# Altium PCB launch_stand_interface.PcbDoc
Units mil, origin at the board's own origin, x right, y up, seen from the top; angles counter-clockwise.
Board outline 2400 x 1500 mil, 2 copper layers (Top Layer, Bottom Layer); 22 components, 14 nets, 62 pads, 13 vias.
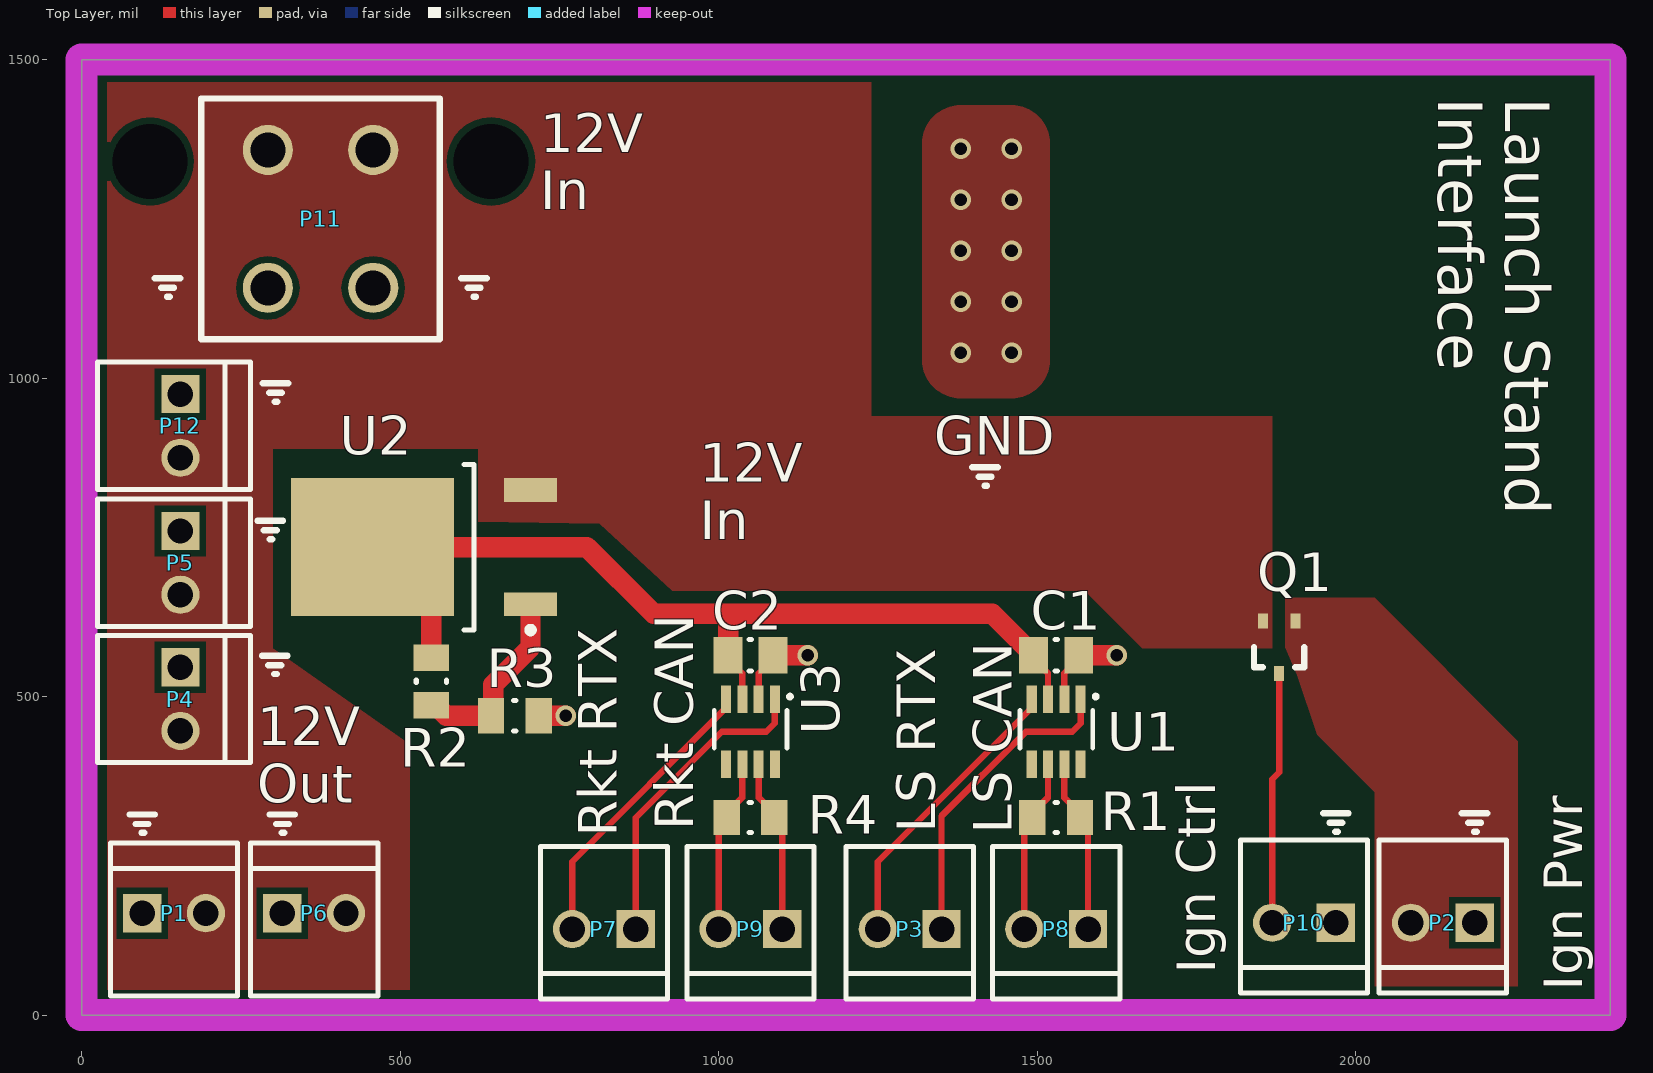
[diagram p0: Top Layer view]
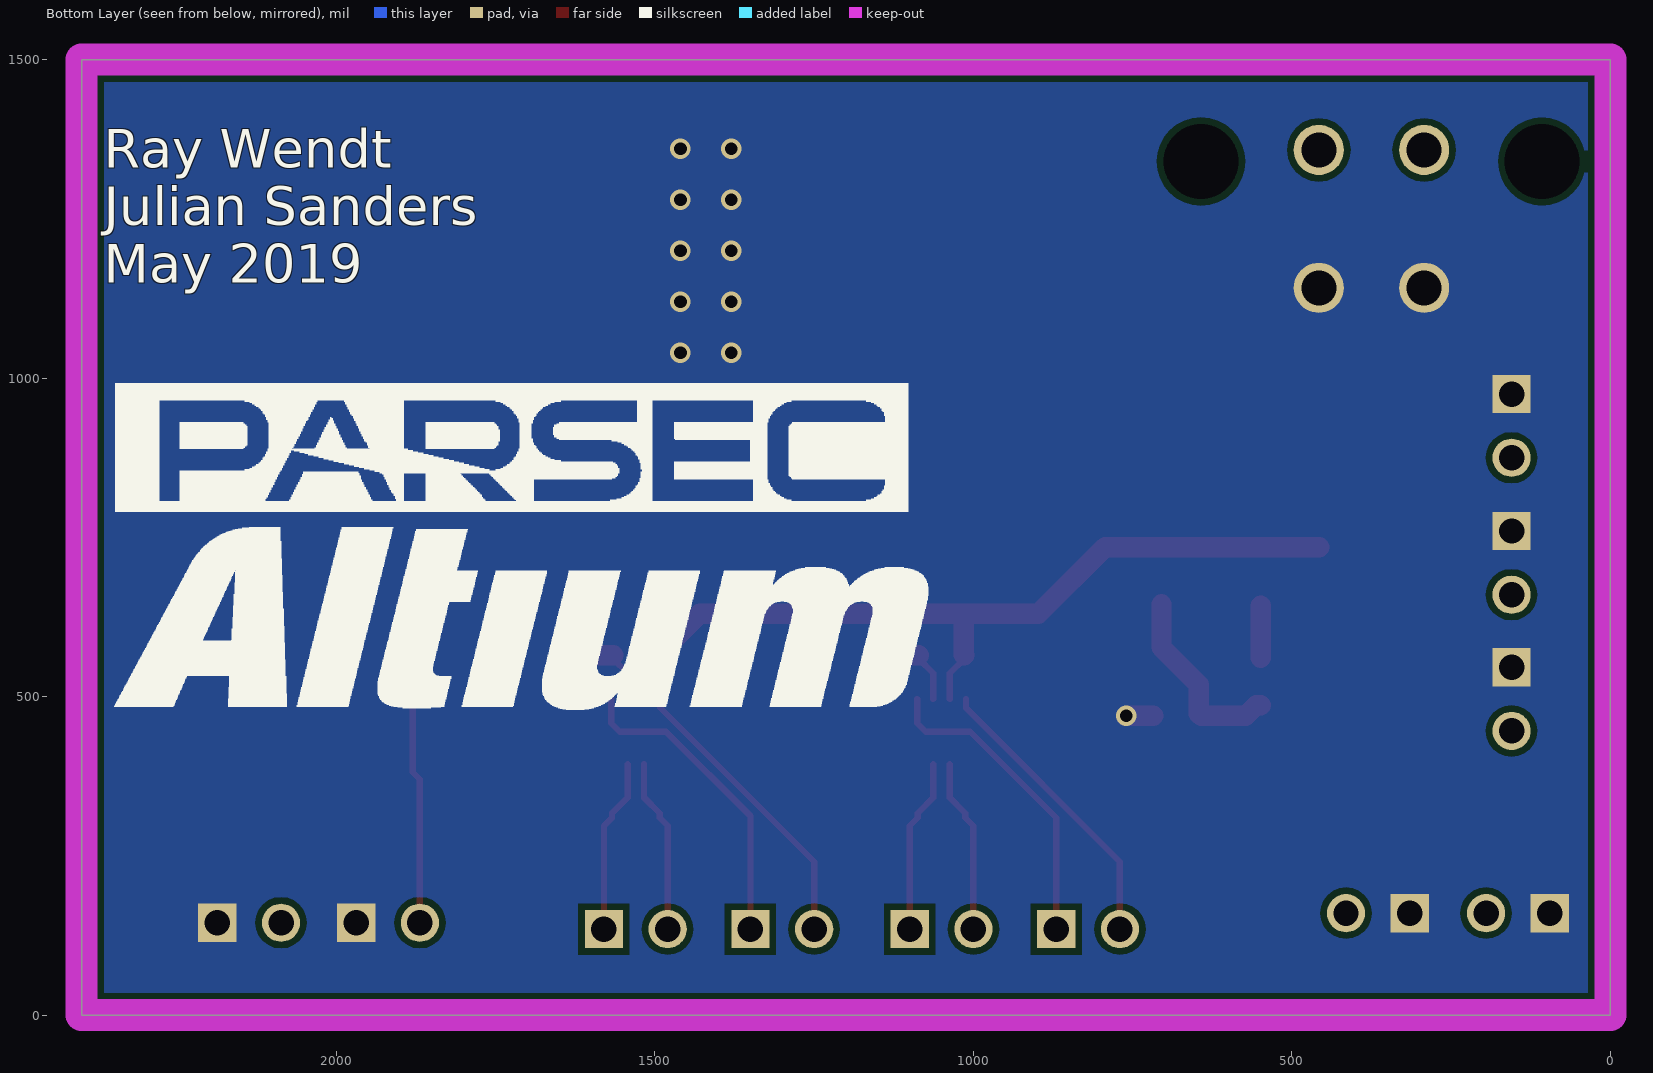
[diagram p1: Bottom Layer view, seen from below]
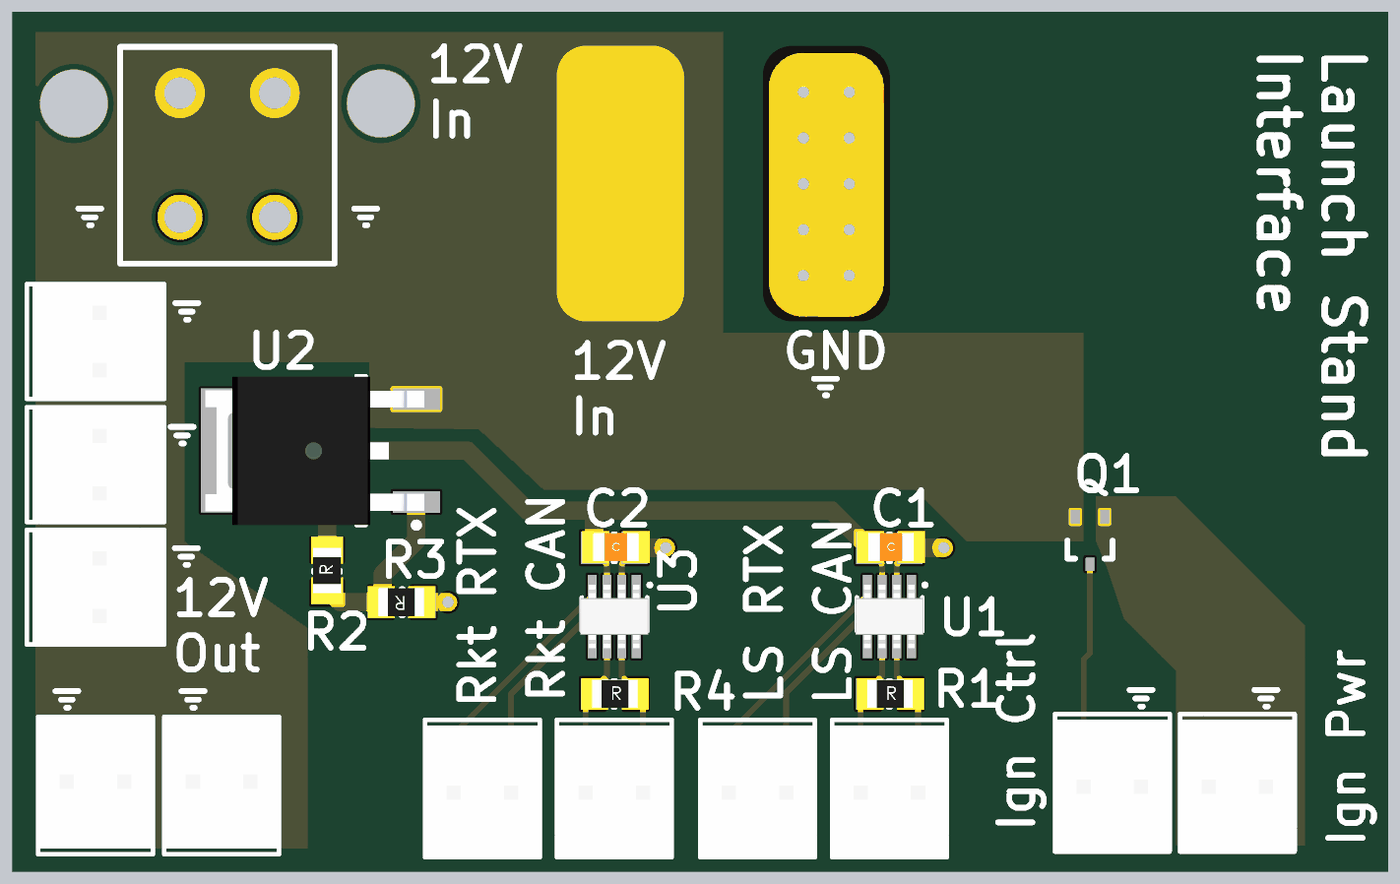
[diagram p2: 3D render of the assembled board from above, using the file's embedded part models]

## Layer stack, top to bottom
Top Solder: solder mask 0.4, Solder Resist, Dk 3.5
Top Layer: signal copper 1.4
Dielectric 1: dielectric 12.6, FR-4, Dk 4.8
Bottom Layer: signal copper 1.4
Bottom Solder: solder mask 0.4, Solder Resist, Dk 3.5

## Board outline
0,0 2400,0 2400,1500 0,1500

## Design rules (kind name [scope] priority, off if disabled: settings)
Clearance [All] p1: gap=10 ignorepadtopadclearanceinfootprint=FALSE except(0: Arc-Hole Track-Hole SMDPad-Hole THPad-Hole Via-Hole Fill-Hole Poly-Hole Region-Hole Text-Hole)
PlaneConnect PlaneConnect_2 [All] p1 off: planeconnectstyle=Relief reliefexpansion=20 reliefentries=4 reliefconductorwidth=10 reliefairgap=10
PlaneConnect PlaneConnect_1 [IsVia] p2 off: planeconnectstyle=Direct reliefexpansion=20 reliefentries=4 reliefconductorwidth=10 reliefairgap=10
PlaneConnect DirectConnect [All] p3: planeconnectstyle=Direct reliefexpansion=20 reliefentries=4 reliefconductorwidth=10 reliefairgap=10
PolygonConnect PolygonConnect_4 [All vs IsNamedPolygon('Ignition Out')] p1: connectstyle=Direct reliefconductorwidth=10 reliefentries=4 polygonreliefangle="90 Angle" airgapwidth=10
PolygonConnect PolygonConnect_3 [All vs IsNamedPolygon('Ignition Out')] p2: thpad.connectstyle=Direct thpad.reliefconductorwidth=10 thpad.reliefentries=4 thpad.polygonreliefangle="90 Angle" thpad.airgapwidth=10 smdpad.connectstyle=Relief smdpad.reliefconductorwidth=10 smdpad.reliefentries=4 smdpad.polygonreliefangle="90 Angle" smdpad.airgapwidth=10 via.connectstyle=Relief via.reliefconductorwidth=10 via.reliefentries=4 via.polygonreliefangle="90 Angle" via.airgapwidth=10
PolygonConnect PolygonConnect_2 [All vs IsNamedPolygon('GND Pad Metal') Or  IsNamedPolygon('12V Power') Or  IsNamedPolygon('GND Mask Open') Or  IsNamedPolygon('12V Pad Metal') Or  IsNamedPolygon('Bottom Layer-GND') Or  IsNamedPolygon('12V Mask Open')] p3: connectstyle=Direct reliefconductorwidth=10 reliefentries=4 polygonreliefangle="90 Angle" airgapwidth=10
PolygonConnect PolygonConnect_1 [IsVia] p4: connectstyle=Direct reliefconductorwidth=10 reliefentries=4 polygonreliefangle="90 Angle" airgapwidth=10
PolygonConnect [All] p5: connectstyle=Relief reliefconductorwidth=10 reliefentries=4 polygonreliefangle="90 Angle" airgapwidth=10
RoutingVias [All] p1: holewidth=15 width=25 viastyle="Through Hole" minholewidth=10 minwidth=15 maxholewidth=20 maxwidth=32
SolderMaskExpansion [All] p1: expansion=4
Width [All] p1: maxlimit=32 minlimit=10 preferedwidth=10
29 further rules are at their usual default settings.

## Components (designator, comment, footprint, x,y, rotation, side; value= is the part's Value field where it differs from the comment)
C1 "100n" C0805 1530,565 r0 top
C2 "100n" C0805 1050,565 r0 top
P1 "Molex KK 1x2" "Molex KK 2x1" 145,160 r90 top
P2 "Molex KK 1x2" "Molex KK 2x1" 2137,145 r270 top
P3 "Molex KK 1x2" "Molex KK 2x1" 1300,135 r270 top
P4 "Molex KK 1x2" "Molex KK 2x1" 155,496.18 r0 top
P5 "Molex KK 1x2" "Molex KK 2x1" 155,710 r0 top
P6 "Molex KK 1x2" "Molex KK 2x1" 365,160 r90 top
P7 "Molex KK 1x2" "Molex KK 2x1" 820,135 r270 top
P8 "Molex KK 1x2" "Molex KK 2x1" 1530,135 r270 top
P9 "Molex KK 1x2" "Molex KK 2x1" 1050,135 r270 top
P10 "Molex KK 1x2" "Molex KK 2x1" 1919,145 r270 top
P11 "4-pin-power-atx" 4-pin-atx 375,1250 r180 top
P12 "Molex KK 1x2" "Molex KK 2x1" 155,925 r0 top
Q1 "MCH3484" SC-70FL/MCPH3 1880,577.54 r180 top
R1 "120R" R0805 1530,310 r0 top
R2 "240R" R0805 548.92,523.82 r90 top
R3 "390 R" R0805 680,470 r180 top
R4 "120R" R0805 1050,310 r0 top
U1 "TCAN332DCNT" SOT-23-8 1530,445 r180 top
U2 "LM317" D-PAK 537.4,734.65 r180 top
U3 "TCAN332DCNT" SOT-23-8 1050,445 r180 top

## Footprints (in the part's own frame and the unit in brackets; to place one, negate y for a bottom-side part, rotate by r counter-clockwise, add the part's x,y. Pads: shape width x height; smd on the part's side, far side on the other; paste and mask are expansions set on the pad)
4-pin-atx [mm]
  round 2 hole 1.4: 1(-2.1,2.75) 2(2.1,2.75) 3(-2.1,-2.75) 4(2.1,-2.75)
  round 2 hole 3: ""(-6.8,-2.29) ""(6.8,-2.29)
  silkscreen extent -4.75,-4.8 4.75,4.8
C0805 [mm] "Chip Capacitor, Body 2.0x1.2mm, Height 0.75mm, IPC Medium Density"
  rect 1.15x1.45 smd: 1(-0.9,0) 2(0.9,0)
  silkscreen extent -0.05,-0.62 0.05,0.63, body extent -1.42,-0.67 1.58,0.73, height 0.93
D-PAK [mm] "D-PAK, 4-Leads, Body 6.1x6.5mm, Pitch 2.28mm, Lead Span 9.7mm, IPC Medium Density"
  rect 2.1x0.95 smd: 1(-4.25,2.28) 3(-4.25,-2.28)
  rect 6.5x5.5 smd: 4(2.05,0)
  silkscreen extent -4.38,-3.3 -1.6,3.43, body extent -4.6,-3.28 5.1,3.3, height 2.3
"Molex KK 2x1" [mil]
  rect 60x60 hole 40: 1(0,50)
  round 60 hole 40: 2(0,-50)
  silkscreen extent -130,-100 110,100, body extent -120,-100 110,100, height 458
R0805 [mm] "Chip Resistor, Body 2.0x1.3mm, IPC Medium Density"
  rect 1.05x1.4 smd: 1(-0.95,0) 2(0.95,0)
  silkscreen extent -0.05,-0.6 0.05,0.6, body extent -1.46,-0.7 1.54,0.7, height 0.53
SC-70FL/MCPH3 [mm]
  rect 0.4x0.6 smd: 1(-0.65,-1.05) 2(0.65,-1.05) 3(0,1.05)
  silkscreen extent -1,0 1,0.8
SOT-23-8 [mm] "SOT-23-8"
  rect 0.4x1.1 smd: 1(-0.975,-1.3) 2(-0.325,-1.3) 3(0.325,-1.3) 4(0.975,-1.3) 5(0.975,1.3) 6(0.325,1.3) 7(-0.325,1.3) 8(-0.975,1.3)
  silkscreen extent -1.65,-1.48 1.44,0.65, body extent -1.5,-1.4 1.5,1.4, height 1.11

## Part data
C1 C2: library part C0805, "0805 Capacitor"
P1 P2 P3 P4 P5 P6 P7 P8 P9 P10 P12: "1x2 Molex KK Connector"
R1 R2 R3 R4: library part R0805, "RESISTOR 0805"
U1 U3: "IC TXRX CAN 3.3V SOT23-8"
U2: "Linear Voltage Regulator"

## Via types
v1: diameter 32, hole 20, Top Layer to Bottom Layer, 13 vias

## Nets (pads, with @x,y where several pads share a name; then routed paths per layer and width w, separated by ;. In a path a pad name is that pad's centre, name@x,y a point inside that pad or via, vN(x,y) a via of type N, cw(c..) or ccw(c..) an arc to the next point about the centre after c; other vN are vias at no path point)
3.3V: C1.1 C2.1 R2.2 U1.3 U2.4 U3.3 | length 1414.4
  Top Layer w10: C2.1 1014.57,559.09 1037.2,536.46 U3.3 ; C1.1 1494.57,559.09 1517.2,536.46 U1.3
  Top Layer w32: U2.4 793.39,734.65 898.03,630 1015,630 ; R2.2 U2.4@548.92,642.42 ; C2.1 1015,565.43 1015,630 ; C1.1 1494.57,570.91 1487.93,577.54 1482.02,577.54 1429.57,630 1015,630
12V: P1.2 P4.2 P5.2 P6.2 P11.3 P11.4 P12.2 Q1.2 U2.3
CANH1: P9.1 R4.2 U3.7 | length 274.2
  Top Layer w10: U3.7 1062.8,341.5 1087.4,316.89 R4.2 1100,297.4 P9.1
CANH2: P8.1 R1.2 U1.7 | length 274.2
  Top Layer w10: U1.7 1542.8,341.5 1567.4,316.89 R1.2 1580,297.4 P8.1
CANL1: P9.2 R4.1 U3.6 | length 274.2
  Top Layer w10: P9.2 1000,297.4 R4.1 1012.6,316.89 1037.2,341.5 U3.6
CANL2: P8.2 R1.1 U1.6 | length 274.2
  Top Layer w10: P8.2 1480,297.4 R1.1 1492.6,316.89 1517.2,341.5 U1.6
GND: C1.2 C2.2 P1.1 P2.1 P4.1 P5.1 P6.1 P10.1 P11.1 P11.2 P12.1 R3.1 U1.2 U3.2 | length 313.1
  Top Layer w10: U3.2 1062.8,536.46 1085.43,559.09 C2.2 ; U1.2 1542.8,536.46 1565.43,559.09 C1.2
  Top Layer w32: R3.1 v1(760,470) ; C2.2 v1(1140,565) ; C1.2 v1(1625,565)
  other v1: 1380,1040 1460,1040 1380,1120 1460,1120 1380,1200 1460,1200 1380,1280 1460,1280 1380,1360 1460,1360
NetP2_2: P2.2 Q1.1
NetP3_1: P3.1 U1.1 | length 494.1
  Top Layer w10: P3.1 1350,312.5 1482.5,445 1555,445 1568.39,458.39 U1.1
NetP3_2: P3.2 U1.4 | length 461.3
  Top Layer w10: P3.2 1250,240.79 1491.61,482.4 U1.4
NetP7_1: P7.1 U3.1 | length 492.6
  Top Layer w10: P7.1 870,310 1005,445 1075,445 1088.39,458.39 U3.1
NetP7_2: P7.2 U3.4 | length 461.3
  Top Layer w10: P7.2 770,240.79 1011.61,482.4 U3.4
NetP10_2: P10.2 Q1.3 | length 395.8
  Top Layer w10: P10.2 1869,370 1880,381 Q1.3
NetR2_1: R2.1 R3.2 U2.1 | length 301.1
  Top Layer w32: R2.1 555.81,486.42 572.22,470 R3.2 645.95,473.35 645.95,518.76 704.72,577.54 U2.1
pads on no net: P11. U1.5 U1.8 U3.5 U3.8

## Polygon pours and split planes (outlines as drawn)
12V on Top Layer "12V Power" (solid, pour order 9): 40,40 40,1470 1240,1470 1240,940 1869,940 1869,576 1664.88,576 1574.88,666 927,666 813.54,771.78 622.84,774.16 622.84,889 300,889 300,576 515,425 515,40 300,40
NetP2_2 on Top Layer "Ignition Out" (solid, pour order 11): 1890,655 1890,577.54 1908.4,533.4 1940,440 2030,350 2030,45 2255,45 2255,430 2030,655
GND on Top Layer "GND Pad Metal" (solid, pour order 5): 1380,1428.42 ccw(c1380,1368.42) 1320,1368.42 1320,1028.42 ccw(c1380,1028.42) 1380,968.42 1460,968.42 ccw(c1460,1028.42) 1520,1028.42 1520,1368.42 ccw(c1460,1368.42) 1460,1428.42
12V on Top Layer "12V Pad Metal" (solid, pour order 3): 1020,1460 ccw(c1020,1400) 960,1400 960,1060 ccw(c1020,1060) 1020,1000 1100,1000 ccw(c1100,1060) 1160,1060 1160,1400 ccw(c1100,1400) 1100,1460
no net on Top Solder "GND Mask Open" (solid): 1360.88,1440.88 ccw(c1360.87,1389.13) 1309.12,1389.12 1309.12,1011.75 ccw(c1360.87,1011.75) 1360.88,960 1479.12,960 ccw(c1479.12,1011.75) 1530.88,1011.75 1530.88,1379.72 ccw(c1473.71,1383.71) 1477.59,1440.88
no net on Top Solder "12V Mask Open" (solid, pour order 7): 1001.75,1440.88 ccw(c1001.75,1389.13) 950,1389.12 950,1011.75 ccw(c1001.75,1011.75) 1001.75,960 1120,960 ccw(c1120,1011.75) 1171.75,1011.75 1171.75,1379.72 ccw(c1114.59,1383.71) 1118.47,1440.88
GND on Bottom Layer "Bottom Layer-GND" (solid, pour order 0): 25,25 2375,25 2375,1475 25,1475 25,860 25,765

## Keep-outs
Keep-Out Layer:
  the board outline again, w50

## Silkscreen, mask and mechanical layers (free items; w line width, h text height)
Top Overlay:
  lines w10: 75,315 115,315 ; 85,300 105,300 ; 94,286 98,286 ; 115,1156.73 155,1156.73 ; 125,1141.73 145,1141.73 ; 134,1127.73 138,1127.73 ; 276,776 316,776 ; 283.22,564.41 323.22,564.41 ; 284.22,992 324.22,992 ; 286,761 306,761 ; 293.22,549.41 313.22,549.41 ; 294.22,977 314.22,977 ; 295,315 335,315 ; 295,747 299,747 ; 302.22,535.41 306.22,535.41 ; 303.22,963 307.22,963 ; 305,300 325,300 ; 314,286 318,286 ; 596.14,1156.73 636.14,1156.73 ; 606.14,1141.73 626.14,1141.73 ; 615.14,1127.73 619.14,1127.73 ; 1398.47,860 1438.47,860 ; 1408.47,845 1428.47,845 ; 1417.47,831 1421.47,831 ; 1949,317 1989,317 ; 1959,302 1979,302 ; 1968,288 1972,288 ; 2167,317 2207,317 ; 2177,302 2197,302 ; 2186,288 2190,288
  text "Launch Stand / Interface" at 2130,1440 h70 r270
  text "12V / In" at 720,1265 h60
  text "GND" at 1338.47,880 h60
  text "12V / In" at 970,747 h60
  text "12V / Out" at 276,333.62 h60
  text "Rkt CAN" at 960,290 h60 r90
  text "LS RTX" at 1340,286.38 h60 r90
  text "LS CAN" at 1460,285 h60 r90
  text "Rkt RTX" at 840,280 h60 r90
  text "Ign Ctrl" at 1780,65 h60 r90
  text "Ign Pwr" at 2356,38 h60 r90
Bottom Overlay:
  drawing of 3605 lines, arcs and shapes, not listed
  text "Ray Wendt / Julian Sanders / May 2019" at 2365,1150 h60